# Altium PCB USB-A-SMD_U217-041N-4BV81.pcbdoc
Units mm, origin at the board's own origin, x right, y up, seen from the top; angles counter-clockwise.
Board outline 26.8 x 35.37 mm, 2 copper layers (Top Layer, Bottom Layer); 1 components, 0 nets, 6 pads, 0 vias.
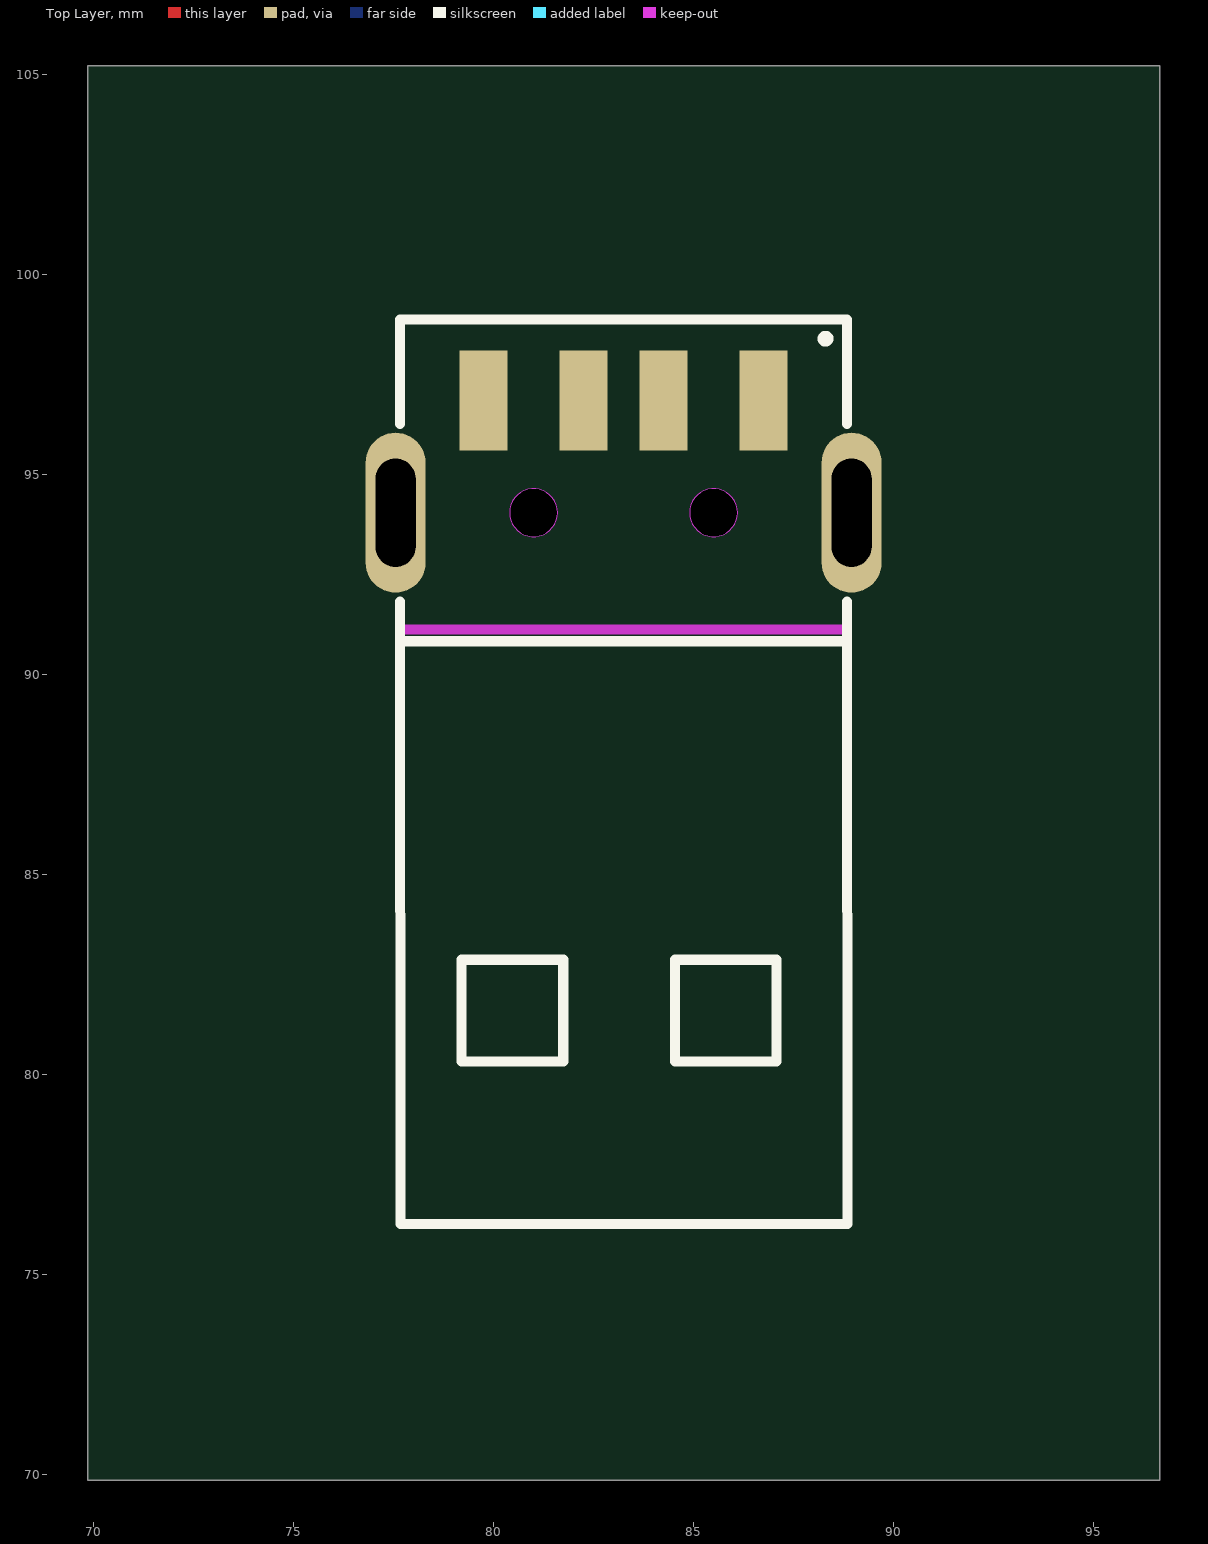
[diagram p0: Top Layer view]
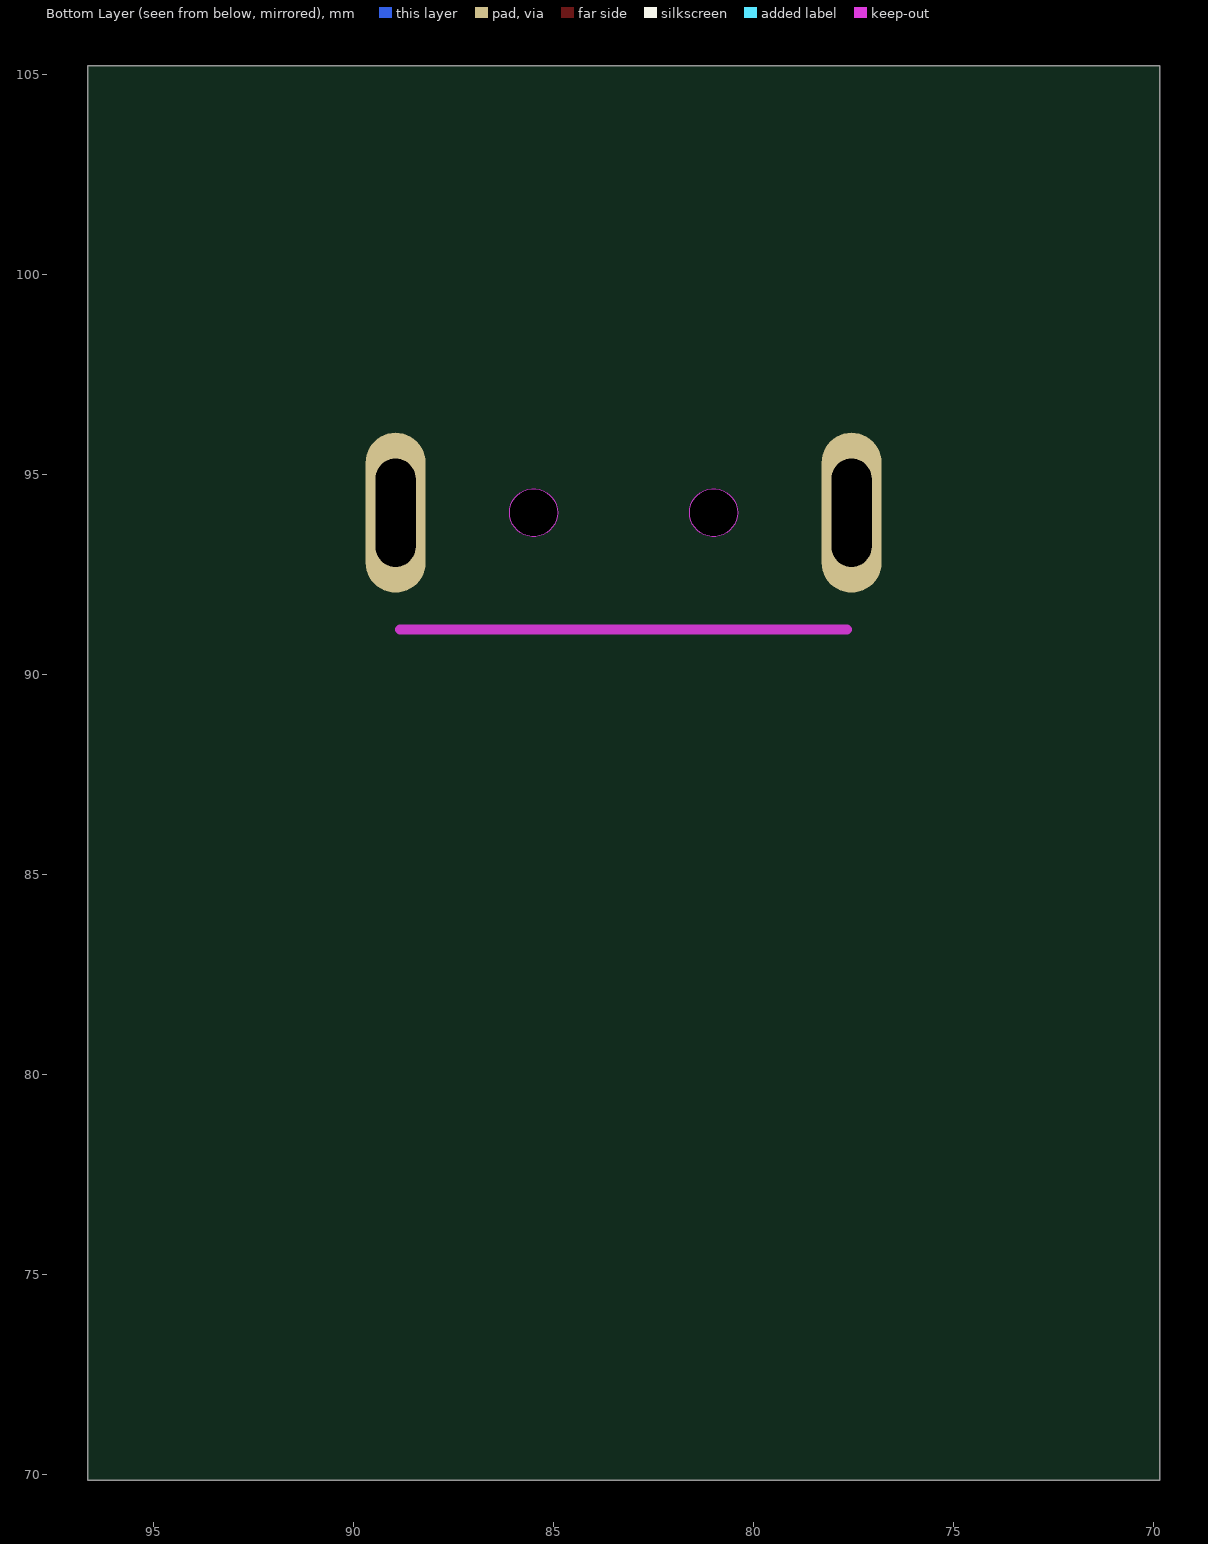
[diagram p1: Bottom Layer view, seen from below]

## Layer stack, top to bottom
Top Layer: signal copper (thickness not stored)
Dielectric: dielectric 0.32, FR-4, Dk 4.8
Bottom Layer: signal copper (thickness not stored)

## Board outline
96.65,69.85 69.85,69.85 69.85,105.22 96.65,105.22

## Components (designator, comment, footprint, x,y, rotation, side; value= is the part's Value field where it differs from the comment)
? "USB-A-SMD_U217-041N-4BV81" USB-A-SMD_U217-041N-4BV81 83.25,95.441 r0 top

## Footprints (in the part's own frame and the unit in brackets; to place one, negate y for a bottom-side part, rotate by r counter-clockwise, add the part's x,y. Pads: shape width x height; smd on the part's side, far side on the other; paste and mask are expansions set on the pad)
USB-A-SMD_U217-041N-4BV81 [mm]
  rect 1.2x2.5 smd: 1(3.5,1.4) 2(1,1.4) 3(-1,1.4) 4(-3.5,1.4)
  oval 1.5x4 hole 1 slot 2.7 at 90 deg: 5(-5.7,-1.4) 6(5.7,-1.4)
  Board Outline Layer lines w0.254: -5.588,-4.318 5.588,-4.318 -5.588,-4.318
  Multi-Layer board cut-out: -1.65,-1.4 -1.709,-1.14 -1.876,-0.931 -2.117,-0.815 -2.384,-0.815 -2.624,-0.931 -2.791,-1.14 -2.85,-1.4 -2.85,-1.4 -2.791,-1.66 -2.624,-1.869 -2.384,-1.985 -2.117,-1.985 -1.876,-1.869 -1.709,-1.66 -1.65,-1.4
  Multi-Layer board cut-out: 2.85,-1.4 2.791,-1.14 2.624,-0.931 2.384,-0.815 2.117,-0.815 1.876,-0.931 1.709,-1.14 1.65,-1.4 1.65,-1.4 1.709,-1.66 1.876,-1.869 2.117,-1.985 2.384,-1.985 2.624,-1.869 2.791,-1.66 2.85,-1.4
  Multi-Layer keep-out region: -1.65,-1.4 -1.709,-1.14 -1.876,-0.931 -2.117,-0.815 -2.384,-0.815 -2.624,-0.931 -2.791,-1.14 -2.85,-1.4 -2.85,-1.4 -2.791,-1.66 -2.624,-1.869 -2.384,-1.985 -2.117,-1.985 -1.876,-1.869 -1.709,-1.66 -1.65,-1.4
  Multi-Layer keep-out region: 2.85,-1.4 2.791,-1.14 2.624,-0.931 2.384,-0.815 2.117,-0.815 1.876,-0.931 1.709,-1.14 1.65,-1.4 1.65,-1.4 1.709,-1.66 1.876,-1.869 2.117,-1.985 2.384,-1.985 2.624,-1.869 2.791,-1.66 2.85,-1.4
  silkscreen extent -5.59,-19.18 5.6,3.43

## Nets (pads, with @x,y where several pads share a name; then routed paths per layer and width w, separated by ;. In a path a pad name is that pad's centre, name@x,y a point inside that pad or via, vN(x,y) a via of type N, cw(c..) or ccw(c..) an arc to the next point about the centre after c; other vN are vias at no path point)
pads on no net: ?.1 ?.2 ?.3 ?.4 ?.5 ?.6